# Altium PCB Main Controller.PcbDoc
Units mm, origin at the board's own origin, x right, y up, seen from the top; angles counter-clockwise.
Board outline 100 x 150 mm, 2 copper layers (Top Layer, Bottom Layer); 19 components, 26 nets, 229 pads, 17 vias.
Unrouted connection lines stored in the file: 1.
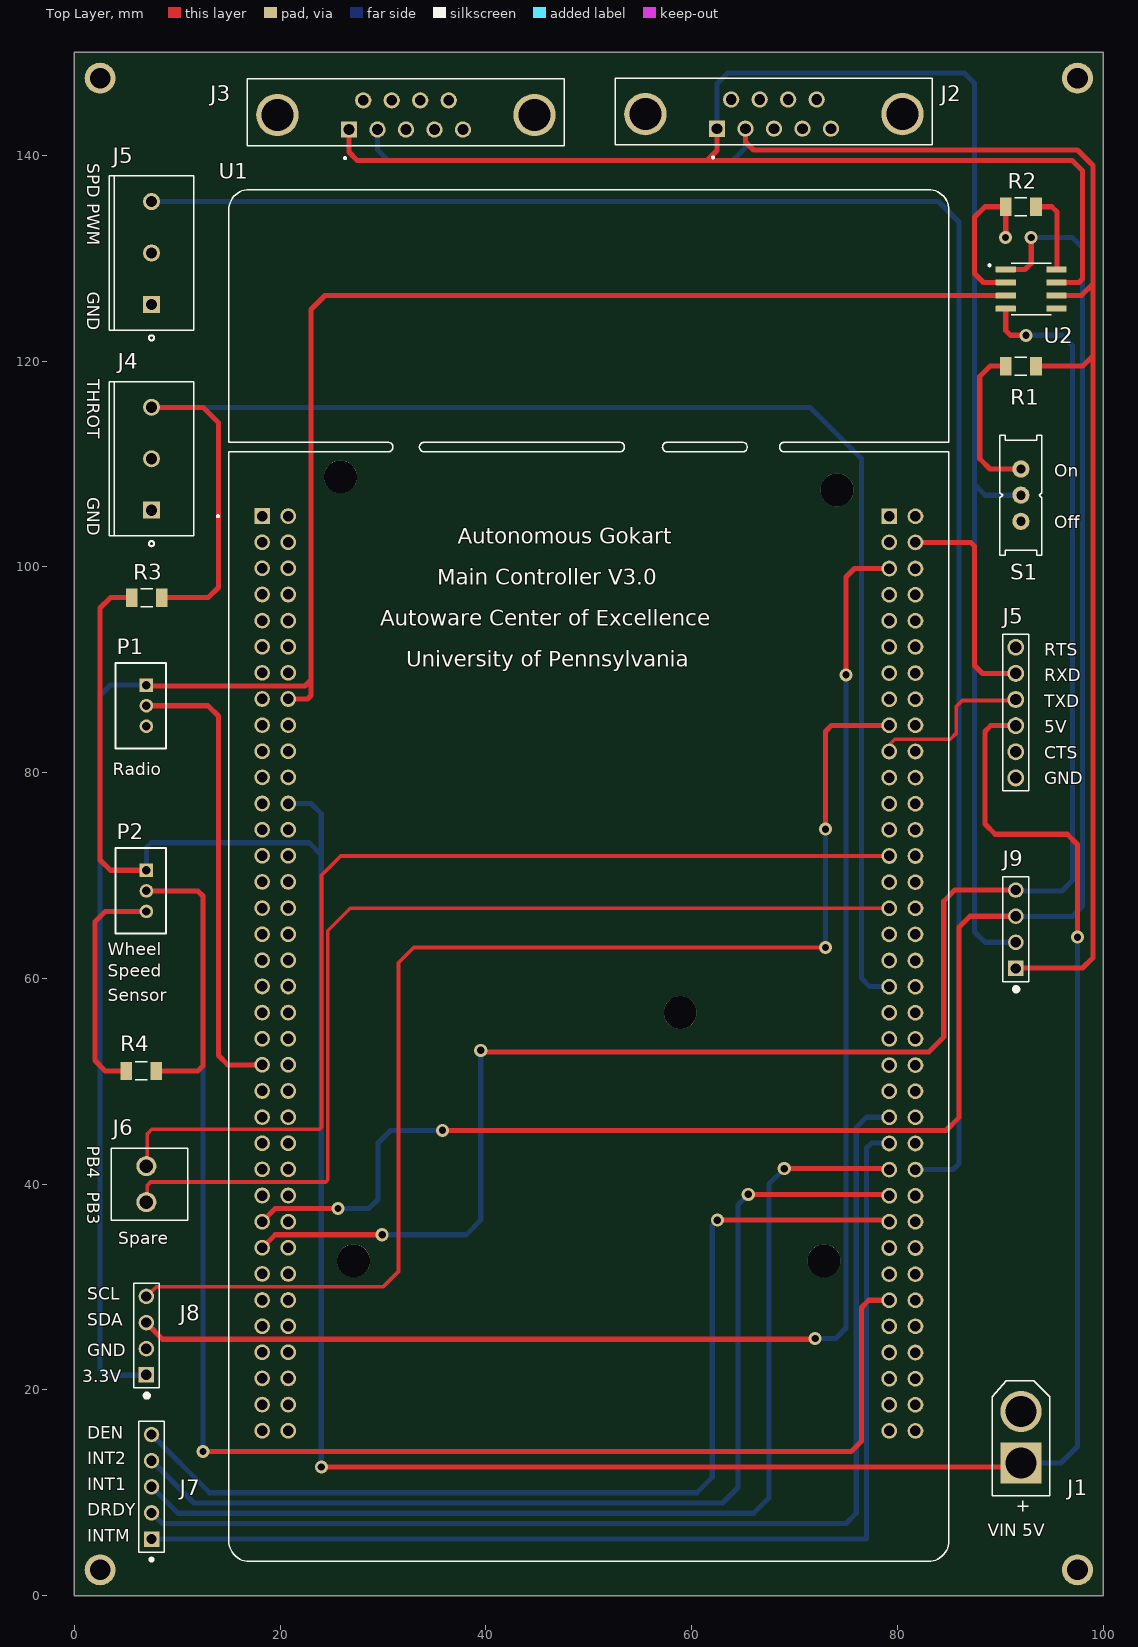
[diagram p0: Top Layer view]
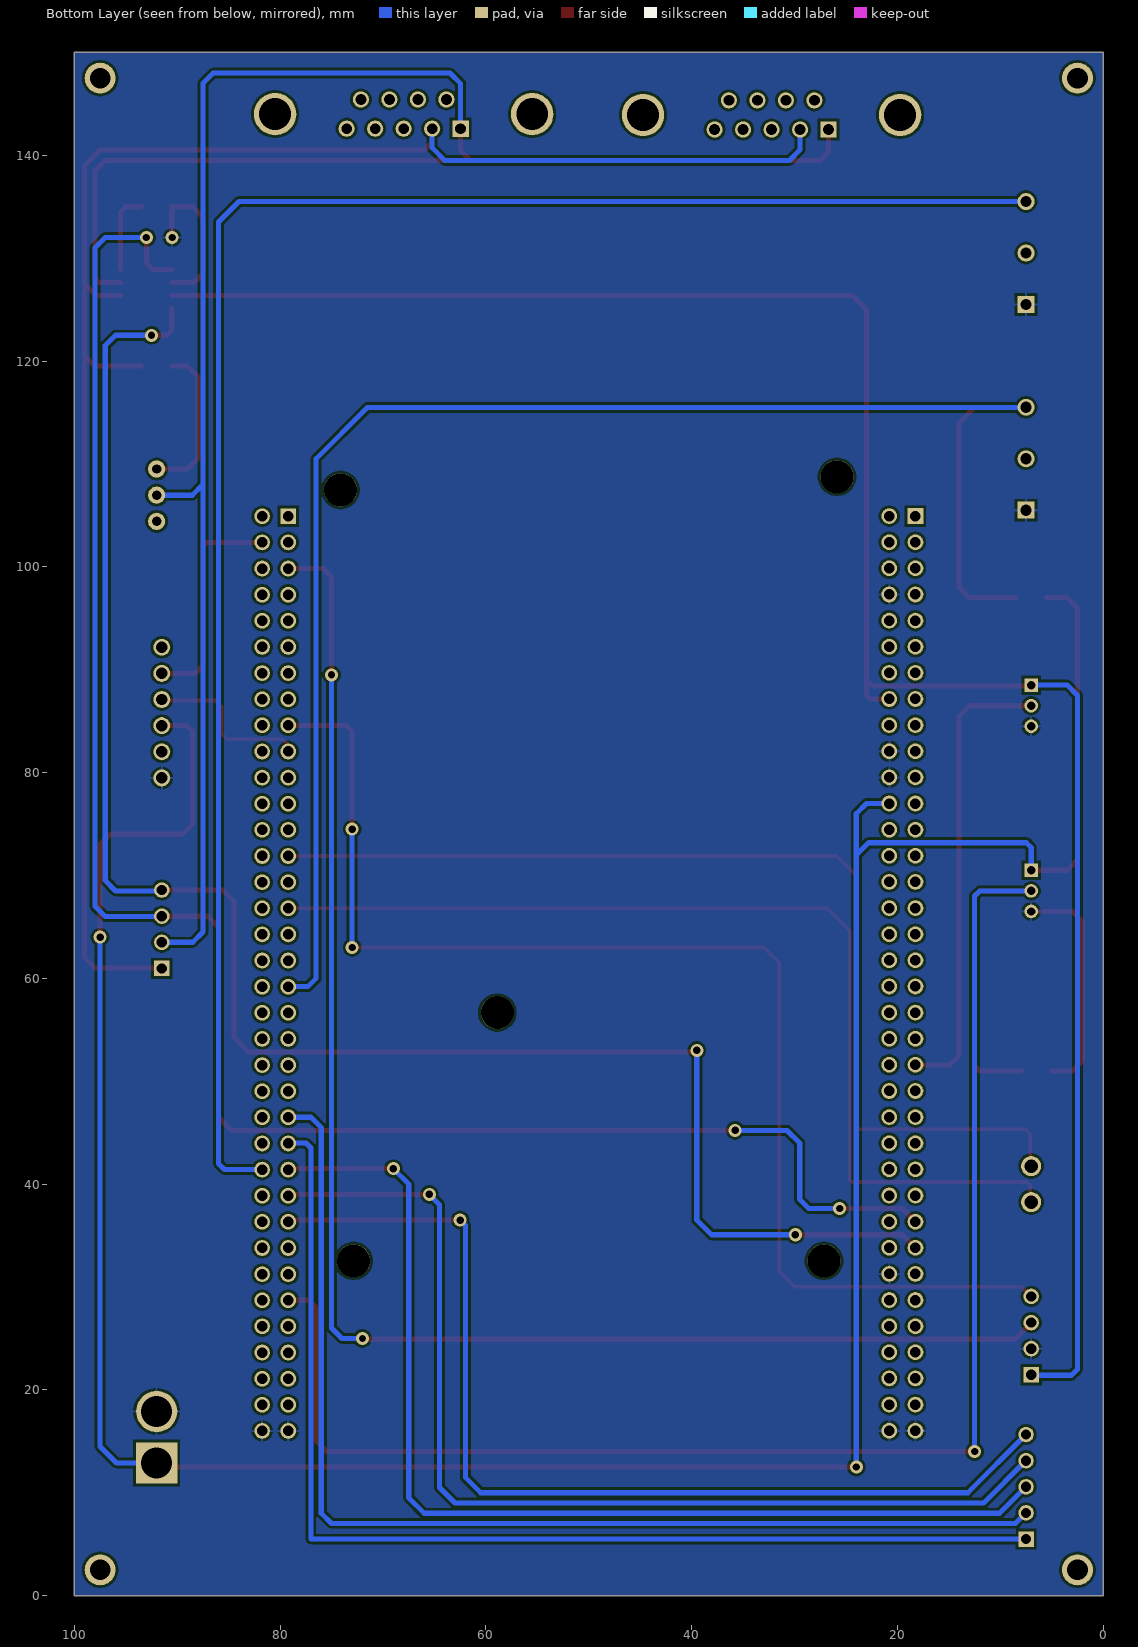
[diagram p1: Bottom Layer view, seen from below]

## Layer stack, top to bottom
Top Solder: solder mask 0.0102, Solder Resist, Dk 3.5
Top Layer: signal copper 0.0356
Dielectric 1: dielectric 0.32, FR-4, Dk 4.8
Bottom Layer: signal copper 0.0356
Bottom Solder: solder mask 0.0102, Solder Resist, Dk 3.5

## Board outline
0,0 0,150 100,150 100,0

## Design rules (kind name [scope] priority, off if disabled: settings)
Clearance [All] p1: gap=0.254 ignorepadtopadclearanceinfootprint=FALSE except(0: Arc-Hole Track-Hole SMDPad-Hole THPad-Hole Via-Hole Fill-Hole Poly-Hole Region-Hole Text-Hole)
HoleSize [All] p1: absolutevalues=TRUE maxlimit=5 minlimit=0.025 maxpercent=80.000 minpercent=20.000
PolygonConnect [All] p1: connectstyle=Relief reliefconductorwidth=0.254 reliefentries=4 polygonreliefangle="90 Angle" airgapwidth=0.254
RoutingVias [All] p1: holewidth=0.711 width=1.27 viastyle="Through Hole" minholewidth=0.711 minwidth=1.27 maxholewidth=0.711 maxwidth=1.27
SolderMaskExpansion [All] p1: expansion=0.102 istentingtop=FALSE
Width [All] p1: maxlimit=2 minlimit=0.254 preferedwidth=0.5 minimp=50.000000 maximp=50.000000 favimp=50.000000
29 further rules are at their usual default settings.

## Classes and differential pairs
component class Sheet1: J1 J2 J3 J4 J5 J6 J7 J8 J9 P1 P2 R1 R2 R3 R4 S1 U1 U2

## Components (designator, comment, footprint, x,y, rotation, side; value= is the part's Value field where it differs from the comment)
J1 "XT30-M" AMASS_XT60-M 92,16.5 r90 top
J2 "D Sub-9" ASSMANN_A-DF_09_A_KG-T2S 67.995,144 r180 top
J3 "D Sub-9" ASSMANN_A-DF_09_A_KG-T2S 32.23,143.92 r180 top
J4 "282836-3" TE_282836-3 7.5,110.5 r90 top
J5 "61300611121" 61300611121 91.5,85.83 r90 top
J5 "282836-3" TE_282836-3 7.5,130.5 r90 top
J6 "Spare" 691214110002 7,40 r270 top
J7 "826629-5" TE_826629-5 7.5,5.5 r90 top
J8 "826629-4" TE_826629-4 7,25.27 r90 top
J9 "826629-4" TE_826629-4 91.5,64.77 r90 top
P1 "Remote Control" B3B-PH-K 7,86.5 r270 top
P2 "Wheel Speed Sensor" B3B-PH-K 7,68.5 r270 top
R1 "120" RESC3216X65N 92,119.5 r0 top
R2 "10K" RESC3216X65N 92,135 r180 top
R3 "2.5K" RESC3216X65N 7.03,97 r0 top
R4 "66K" RESC3216X65N 6.5,51 r0 top
S1 "EG1218" EG1218 92,106.96 r90 top
U1 "NUCLEO-F439ZI" Nucleo-F439ZI 50,70 r0 top
U2 "SN65HVD230QDR" SOIC127P599X175-8N 93,127 r0 top

## Footprints (in the part's own frame and the unit in brackets; to place one, negate y for a bottom-side part, rotate by r counter-clockwise, add the part's x,y. Pads: shape width x height; smd on the part's side, far side on the other; paste and mask are expansions set on the pad)
61300611121 [mm]
  round 1.65 hole 1.1: 1(-6.35,0) 2(-3.81,0) 3(-1.27,0) 4(1.27,0) 5(3.81,0) 6(6.35,0)
  silkscreen extent -7.62,-1.27 7.62,1.27
691214110002 [mm]
  round 1.95 hole 1.3: 1(-1.75,0) 2(1.75,0)
  silkscreen extent -3.5,-3.4 3.5,4
AMASS_XT60-M [mm]
  round 4 hole 3: N(1.4,0)
  rect 4x4 hole 3: P(-3.6,0)
  silkscreen extent -8.3,-2.8 4.4,2.8
ASSMANN_A-DF_09_A_KG-T2S [mm]
  rect 1.575x1.575 / inner round 1.575 / far side rect 1.575x1.575 hole 1.05: 1(5.54,1.42)
  round 1.575 hole 1.05: 2(2.77,1.42) 3(0,1.42) 4(-2.77,1.42) 5(-5.54,1.42) 6(4.155,-1.42) 7(1.385,-1.42) 8(-1.385,-1.42) 9(-4.155,-1.42)
  round 4.116 hole 3.1: S1(-12.495,0) S2(12.495,0)
  silkscreen extent -15.41,-3.5 15.41,4.3
B3B-PH-K [mil]
  rect 52x52 hole 32: 1(-78.74,0)
  round 52 hole 32: 2(0,0) 3(78.74,0)
  silkscreen extent -163,-118 163,75, body extent -156,-89 156,89, height 236
EG1218 [mil]
  round 66 hole 35.43: O(-100,0) P(0,0) S(100,0)
  silkscreen extent -230,-80 230,80
Nucleo-F439ZI [mm]
  rect 1.53x1.53 hole 1.02: CN11_1(-31.75,34.93) CN12_1(29.21,34.91)
  round 1.53 hole 1.02: CN11_2(-31.75,32.39) CN11_3(-31.75,29.85) CN11_4(-31.75,27.31) CN11_5(-31.75,24.77) CN11_6(-31.75,22.23) CN11_7(-31.75,19.69) CN11_8(-31.75,17.15) CN11_9(-31.75,14.61) CN11_10(-31.75,12.07) CN11_11(-31.75,9.53) CN11_12(-31.75,6.99) CN11_13(-31.75,4.45) CN11_14(-31.75,1.91) CN11_15(-31.75,-0.63) CN11_16(-31.75,-3.17) CN11_17(-31.75,-5.71) CN11_18(-31.75,-8.25) CN11_19(-31.75,-10.79) CN11_20(-31.75,-13.33) CN11_21(-31.75,-15.87) CN11_22(-31.75,-18.41) CN11_23(-31.75,-20.95) CN11_24(-31.75,-23.49) CN11_25(-31.75,-26.03) CN11_26(-31.75,-28.57) CN11_27(-31.75,-31.11) CN11_28(-31.75,-33.65) CN11_29(-31.75,-36.19) CN11_30(-31.75,-38.73) CN11_31(-31.75,-41.27) CN11_32(-31.75,-43.81) CN11_33(-31.75,-46.35) CN11_34(-31.75,-48.89) CN11_35(-31.75,-51.43) CN11_36(-31.75,-53.97) CN11_37(-29.21,34.93) CN11_38(-29.21,32.39) CN11_39(-29.21,29.85) CN11_40(-29.21,27.31) CN11_41(-29.21,24.77) CN11_42(-29.21,22.23) CN11_43(-29.21,19.69) CN11_44(-29.21,17.15) CN11_45(-29.21,14.61) CN11_46(-29.21,12.07) CN11_47(-29.21,9.53) CN11_48(-29.21,6.99) CN11_49(-29.21,4.45) CN11_50(-29.21,1.91) CN11_51(-29.21,-0.63) CN11_52(-29.21,-3.17) CN11_53(-29.21,-5.71) CN11_54(-29.21,-8.25) CN11_55(-29.21,-10.79) CN11_56(-29.21,-13.33) CN11_57(-29.21,-15.87) CN11_58(-29.21,-18.41) CN11_59(-29.21,-20.95) CN11_60(-29.21,-23.49) CN11_61(-29.21,-26.03) CN11_62(-29.21,-28.57) CN11_63(-29.21,-31.11) CN11_64(-29.21,-33.65) CN11_65(-29.21,-36.19) CN11_66(-29.21,-38.73) CN11_67(-29.21,-41.27) CN11_68(-29.21,-43.81) CN11_69(-29.21,-46.35) CN11_70(-29.21,-48.89) CN11_71(-29.21,-51.43) CN11_72(-29.21,-53.97) CN12_2(29.21,32.37) CN12_3(29.21,29.83) CN12_4(29.21,27.29) CN12_5(29.21,24.75) CN12_6(29.21,22.21) CN12_7(29.21,19.67) CN12_8(29.21,17.13) CN12_9(29.21,14.59) CN12_10(29.21,12.05) CN12_11(29.21,9.51) CN12_12(29.21,6.97) CN12_13(29.21,4.43) CN12_14(29.21,1.89) CN12_15(29.21,-0.65) CN12_16(29.21,-3.19) CN12_17(29.21,-5.73) CN12_18(29.21,-8.27) CN12_19(29.21,-10.81) CN12_20(29.21,-13.35) CN12_21(29.21,-15.89) CN12_22(29.21,-18.43) CN12_23(29.21,-20.97) CN12_24(29.21,-23.51) CN12_25(29.21,-26.05) CN12_26(29.21,-28.59) CN12_27(29.21,-31.13) CN12_28(29.21,-33.67) CN12_29(29.21,-36.21) CN12_30(29.21,-38.75) CN12_31(29.21,-41.29) CN12_32(29.21,-43.83) CN12_33(29.21,-46.37) CN12_34(29.21,-48.91) CN12_35(29.21,-51.45) CN12_36(29.21,-53.99) CN12_37(31.75,34.91) CN12_38(31.75,32.37) CN12_39(31.75,29.83) CN12_40(31.75,27.29) CN12_41(31.75,24.75) CN12_42(31.75,22.21) CN12_43(31.75,19.67) CN12_44(31.75,17.13) CN12_45(31.75,14.59) CN12_46(31.75,12.05) CN12_47(31.75,9.51) CN12_48(31.75,6.97) CN12_49(31.75,4.43) CN12_50(31.75,1.89) CN12_51(31.75,-0.65) CN12_52(31.75,-3.19) CN12_53(31.75,-5.73) CN12_54(31.75,-8.27) CN12_55(31.75,-10.81) CN12_56(31.75,-13.35) CN12_57(31.75,-15.89) CN12_58(31.75,-18.43) CN12_59(31.75,-20.97) CN12_60(31.75,-23.51) CN12_61(31.75,-26.05) CN12_62(31.75,-28.59) CN12_63(31.75,-31.13) CN12_64(31.75,-33.67) CN12_65(31.75,-36.21) CN12_66(31.75,-38.75) CN12_67(31.75,-41.29) CN12_68(31.75,-43.83) CN12_69(31.75,-46.37) CN12_70(31.75,-48.91) CN12_71(31.75,-51.45) CN12_72(31.75,-53.99)
  round 3.2 hole 3.2 unplated: ""(-24.13,38.74) ""(-22.86,-37.46) ""(8.89,-13.33) ""(22.86,-37.46) ""(24.13,37.47)
  silkscreen extent -36.14,-66.67 35,66.67
RESC3216X65N [mm]
  rect 1.13x1.77 smd: 1(-1.47,0) 2(1.47,0)
  silkscreen extent -0.58,-0.88 0.58,0.88
SOIC127P599X175-8N [mm]
  rrect25% 1.97x0.6 smd: 1(-2.47,1.905) 2(-2.47,0.635) 3(-2.47,-0.635) 4(-2.47,-1.905) 5(2.47,-1.905) 6(2.47,-0.635) 7(2.47,0.635) 8(2.47,1.905)
  silkscreen extent -4.14,-2.52 1.95,2.52, body extent -3,-2.45 3,2.45, height 1.75
TE_282836-3 [mm]
  rect 1.65x1.65 hole 1.1: 1(-5,0)
  round 1.65 hole 1.1: 2(0,0) 3(5,0)
  silkscreen extent -8.5,-4.1 7.5,4.1
TE_826629-4 [mm]
  rect 1.508x1.508 hole 1: 1(-3.81,0)
  round 1.508 hole 1: 2(-1.27,0) 3(1.27,0) 4(3.81,0)
  silkscreen extent -6.03,-1.25 5.08,1.25
TE_826629-5 [mm]
  rect 1.508x1.508 hole 1: 1(0,0)
  round 1.508 hole 1: 2(2.54,0) 3(5.08,0) 4(7.62,0) 5(10.16,0)
  silkscreen extent -2.15,-1.25 11.43,1.25

## Part data
J1: "Plug; DC supply; XT60; male; PIN: 2; for cable; soldered; 30A; 500V", Package=Package, Availability="Not in stock", Check_prices=https://www.snapeda.com/parts/XT60-M/AMASS/view-part/?ref=eda, MF=AMASS, MP=XT60-M, Price=None, SnapEDA_Link=https://www.snapeda.com/parts/XT60-M/AMASS/view-part/?ref=snap
J2 J3: library part A-DF_09_A_KG-T2S, "9 Position D-Sub Receptacle, Female Sockets Connector", Package=None, Availability="In Stock", Check_prices=https://www.snapeda.com/parts/A-DF%2009%20A/KG-T2S/Assmann+WSW+Components/view-part/?ref=eda, MF="Assmann WSW", MP="A-DF 09 A/KG-T2S", Price=None, Purchase-URL="https://pricing.snapeda.com/search/part/A-DF 09 A/KG-T2S/?ref=eda", SnapEDA_Link=https://www.snapeda.com/parts/A-DF%2009%20A/KG-T2S/Assmann+WSW+Components/view-part/?ref=snap
J4 J5: "TERM BLOCK 3POS SIDE ENTRY 5MM", Package=None, Availability=Unavailable, MP=282836-3, Price=None
J5: "Connector Header Through Hole 6 position 0.100 (2.54mm)", Package=None, Availability="In Stock", Check_prices=https://www.snapeda.com/parts/61300611121/Wurth+Elektronik/view-part/?ref=eda, MF="WÃ¼rth Elektronik", MP=61300611121, Price=None, Purchase-URL=https://pricing.snapeda.com/search/part/61300611121/?ref=eda, SnapEDA_Link=https://www.snapeda.com/parts/61300611121/Wurth+Elektronik/view-part/?ref=snap
J6: library part 691214110002, "2 Position Wire to Board Terminal Block Horizontal with Board 0.138 (3.50mm) Through Hole", Package=None, Availability="In Stock", Check_prices=https://www.snapeda.com/parts/691214110002/Wurth+Elektronik/view-part/?ref=eda, MF="WÃ¼rth Elektronik", MP=691214110002, Price=None, Purchase-URL=https://pricing.snapeda.com/search/part/691214110002/?ref=eda, SnapEDA_Link=https://www.snapeda.com/parts/691214110002/Wurth+Elektronik/view-part/?ref=snap
J7: "Board-To-Board Connector, AMPMODU MOD II Series, Through Hole, Header, 5, 2.54 mm", Package=None, Availability=Unavailable, Centerline_Pitch="2.54 mm[.1 in]", EU_RoHS_Compliance=Compliant, MF="TE Connectivity", MP=826629-5, Number_of_Positions=5, Price=None, Product_Type=Connector, SnapEDA_Link=https://www.snapeda.com/parts/826629-5/TE%20Connectivity%20AMP%20Connectors/view-part/905319/?ref=snap, TE_purchase_URL=https://www.te.com/usa-en/product-826629-5.html?te_bu=Cor&te_type=disp&te_campaign=seda_glo_cor-seda-global-disp-prtnr-fy19-seda-model-bom-cta_sma-317_1&elqCampaignId=32493
J8 J9: "Conn Unshrouded Header HDR 4 POS 2.54mm Solder ST Thru-Hole Automotive Carton", Package=None, Availability=Unavailable, EU_RoHS_Compliance=Compliant, MF="TE Connectivity", MP=826629-4, Price=None, SnapEDA_Link=https://www.snapeda.com/parts/826629-4/TE%20Connectivity%20AMP%20Connectors/view-part/891255/?ref=snap, TE_purchase_URL=https://www.te.com/usa-en/product-826629-4.html?te_bu=Cor&te_type=disp&te_campaign=seda_glo_cor-seda-global-disp-prtnr-fy19-seda-model-bom-cta_sma-317_1&elqCampaignId=32493
P1 P2: library part B3B-PH-K, "Connector Header Through Hole 3 position 0.079 (2.00mm)", Package=None, Availability="No availability data", Check_prices=https://www.snapeda.com/parts/B3B-PH-K/JST/view-part/2895696/?ref=eda, MF=JST, MP=B3B-PH-K, Price=None, SnapEDA_Link=https://www.snapeda.com/parts/B3B-PH-K/JST/view-part/2895696/?ref=snap
R1 R2 R3 R4: library part KTR18EZPF9530, Package=None, Availability=Unavailable, MP=KTR18EZPF9530, Price=None
S1: "<b>SLIDING SWITCH</b><p> 0.1\" spacing through hole, vertical SPDT slide switch <p>http://www.ladyada.net/library/pcb/eaglelibrary.html</p>", Package=None, Availability=Unavailable, MP=EG1218, Price=None
U1: "STM32F429ZI, mbed-Enabled Development Nucleo-144 STM32F4 ARMÂ® CortexÂ®-M4 MCU 32-Bit Embedded Evaluation Board", Package=None, Availability=Unavailable, MP=NUCLEO-F429ZI, Price=None
U2: "3.3-V CAN Transceiver with Standby Mode 8-SOIC -40 to 125", Package="SOIC-8 Texas Instruments", Availability=Good, Check_prices=https://www.snapeda.com/parts/SN65HVD230QDR/Texas%20Instruments/view-part/1178075/?ref=eda, MF="Texas Instruments", MP=SN65HVD230QDR, Price=None, Purchase-URL=https://pricing.snapeda.com/search/part/SN65HVD230QDR/?ref=eda, SnapEDA_Link=https://www.snapeda.com/parts/SN65HVD230QDR/Texas%20Instruments/view-part/1178075/?ref=snap

## Free pads (board coordinates)
  round 3 hole 2: 6(2.5,2.5) 6(2.5,147.5) 6(97.5,2.5) 6(97.5,147.5)

## Via types
v1: diameter 1.27, hole 0.711, Top Layer to Bottom Layer, 17 vias

## Nets (pads, with @x,y where several pads share a name; then routed paths per layer and width w, separated by ;. In a path a pad name is that pad's centre, name@x,y a point inside that pad or via, vN(x,y) a via of type N, cw(c..) or ccw(c..) an arc to the next point about the centre after c; other vN are vias at no path point)
3.3V: J8.1 P1.1 U1.CN11_44 U2.3 | length 199.3
  Top Layer w0.5: P1.1@7,88.421 22.421,88.421 23,89 ; U1.CN11_44 22.65,87.15 23,87.5 23,89 ; U2.3 24.365,126.365 23,125 23,89
  Bottom Layer w0.5: J8.1@7,21.42 3.08,21.42 2.5,22 2.5,87.5 3.5,88.5 P1.1
5V: J1.P J5.3@91.5,84.56 P2.1 R3.1 U1.CN11_48 | length 274.6
  Top Layer w0.5: R3.1@5.5,97 3.5,97 2.5,96 2.5,71.5 3.5,70.5 P2.1 ; v1(24,12.5) J1.P@92,12.5 ; J5.3@91.5,84.56 89.06,84.56 88.5,84 88.5,75 89.5,74 96.5,74 97.5,73 v1(97.5,64)
  Bottom Layer w0.5: P2.1 7,72.707 7.472,73.179 22.821,73.179 24,72 ; U1.CN11_48 23.01,76.99 24,76 24,72 ; v1(24,12.5) 24,72 ; J1.P 95.9,12.9 97.5,14.5 v1(97.5,64)
CAN_HIGH: J2.1 J3.1 J9.2 S1.P U2.7 | length 213
  Top Layer w0.5: J3.1 26.69,140.31 27.5,139.5 61.5,139.5 ; J2.1 62.455,140.455 61.5,139.5 ; U2.7 97.635,127.635 98,128 98,138.5 97,139.5 61.5,139.5
  Bottom Layer w0.5: J2.1 62.455,146.955 63.5,148 86.5,148 87.5,147 87.5,108 ; J9.2 88.5,63.5 87.5,64.5 87.5,108 ; S1.P 88.54,106.96 87.5,108
CAN_LOW: J2.2 J3.2 J9.1 R1.2 U2.6 | length 171.4
  Top Layer w0.5: J2.2 65.225,141.275 66,140.5 97.5,140.5 99,139 99,127.5 ; J9.1 91.54,61 98,61 99,62 99,120.5 ; R1.2 98,119.5 99,120.5 ; U2.6 97.865,126.365 99,127.5 ; 99,120.5 99,127.5
  Bottom Layer w0.5: J3.2 29.46,140.54 30.5,139.5 64,139.5 65.225,140.725 J2.2
CAN_RX: J9.4 U1.CN11_29 U2.4 | length 172.3
  Top Layer w0.5: U1.CN11_29 19.519,35.079 v1(29.921,35.079) ; v1@39.5,52.841 83.048,52.841 84.5,54.293 84.5,67.5 85.58,68.58 J9.4 ; U2.4 90.53,122.97 91,122.5 v1(92.5,122.5)
  Bottom Layer w0.5: v1(29.921,35.079) 38.079,35.079 39.5,36.5 v1(39.5,53) ; J9.4 91.58,68.5 96,68.5 97,69.5 97,121.5 96,122.5 v1(92.5,122.5)
CAN_TX: J9.3 U1.CN11_28 U2.1 | length 181.2
  Top Layer w0.5: U1.CN11_28 19.519,37.619 v1(25.619,37.619) ; v1(35.779,45.221) 84.721,45.221 86,46.5 86,65 87.04,66.04 J9.3 ; U2.1 92.405,128.905 93,129.5 v1(93,132)
  Bottom Layer w0.5: v1(25.619,37.619) 28.619,37.619 29.5,38.5 29.5,44 30.721,45.221 v1(35.779,45.221) ; J9.3 91.54,66 97,66 98,67 98,131 97,132 v1(93,132)
CTS: J5.2@91.5,82.02
DEN: J7.5 U1.CN12_28 | length 99.5
  Top Layer w0.5: v1(62.5,36.5) 79.04,36.5 U1.CN12_28
  Bottom Layer w0.5: J7.5 13.16,10 60.5,10 62,11.5 62,36 v1(62.5,36.5)
DRDY: J7.2 U1.CN12_24 | length 111.1
  Bottom Layer w0.5: J7.2@7,7.92 J7.2@7.58,7.92 ; J7.2 8.54,7 75,7 76,8 76,45.5 77,46.5 79.2,46.5 U1.CN12_24
GND: J1.N J4.1 J5.1 J8.2 P1.3 P2.3 R2.2 R4.1 U1.CN11_36 U1.CN11_40 U1.CN11_46 U1.CN11_47 U1.CN11_66 U1.CN11_72 U1.CN12_36 U1.CN12_72 U2.2 | length 37.7
  Top Layer w0.5: R4.1 3,51 2,52 2,65.5 3,66.5 P2.3 ; U2.2 88.365,127.635 87.5,128.5 87.5,134 88.5,135 R2.2 v1@90.53,132.03
  other v1: 90.5,132
INT1: J7.3 U1.CN12_26 | length 104.6
  Top Layer w0.5: v1(69,41.5) 79.12,41.5 U1.CN12_26
  Bottom Layer w0.5: J7.3 10.08,8 66,8 67.5,9.5 67.5,40 v1(69,41.5)
INT2: J7.4 U1.CN12_27 | length 102
  Top Layer w0.5: v1(65.5,39) 79.08,39 U1.CN12_27
  Bottom Layer w0.5: J7.4 11.62,9 63,9 64.5,10.5 64.5,38 v1(65.5,39)
INTM: J7.1 U1.CN12_25 | length 109.9
  Bottom Layer w0.5: J7.1 77,5.5 77,43.5 77.5,44 79.16,44 U1.CN12_25
NetR1_1: R1.1 S1.S | length 15.4
  Top Layer w0.5: R1.1 89,119.5 88,118.5 88,110.5 89,109.5 S1.S
NetR2_1: R2.1 U2.8 | length 7.8
  Top Layer w0.5: R2.1 95,135 95.5,134.5 95.5,128.935 U2.8
PB3: J6.2 U1.CN12_16 | length 99.1
  Top Layer w0.35: J6.2 7.1,38.35 7.1,39.9 7.4,40.2 24.423,40.2 24.628,40.405 24.628,64.628 26.81,66.81 U1.CN12_16
PB4: J6.1 U1.CN12_14 | length 100.8
  Top Layer w0.35: J6.1 7.1,41.85 7.1,44.9 7.516,45.316 23.819,45.316 24.024,45.521 24.024,70.024 25.89,71.89 U1.CN12_14
Radio: P1.2 U1.CN11_22 | length 45
  Top Layer w0.5: P1.2 13,86.5 14,85.5 14,52.5 14.91,51.59 U1.CN11_22
RTS: J5.6
RXD: J5.5 U1.CN12_38 | length 21.8
  Top Layer w0.5: U1.CN12_38 87.13,102.37 87.5,102 87.5,90.4 88.26,89.64 J5.5
SCL: J8.4 U1.CN12_9 | length 125.1
  Top Layer w0.35: J8.4@7,29.04 7.998,30.038 30.038,30.038 31.5,31.5 31.5,61.5 33,63 v1(73,63)
  Top Layer w0.5: v1(73,74.5) 73,84 73.59,84.59 U1.CN12_9
  Bottom Layer w0.5: v1(73,63) v1(73,74.5)
SDA: J8.3 U1.CN12_3 | length 146.7
  Top Layer w0.5: J8.3@7,26.5 8.579,24.921 17.724,24.921 18.776,24.921 20.264,24.921 21.316,24.921 71.921,24.921 v1(72,25) ; v1(75,89.5) 75,99 75.83,99.83 U1.CN12_3
  Bottom Layer w0.5: v1(72,25) 74,25 75,26 v1(75,89.5)
"Speed PWM": J5.3@7.5,135.5 U1.CN12_62 | length 175.3
  Bottom Layer w0.5: J5.3@7.5,135.5 84,135.5 85.987,133.513 85.987,41.987 85.41,41.41 U1.CN12_62
Switch: P2.2 R4.2 U1.CN12_31 | length 167.1
  Top Layer w0.5: P2.2 12,68.5 12.5,68 12.5,51.5 12,51 R4.2 ; v1(12.5,14) 75.5,14 76.5,15 76.5,28 77.21,28.71 U1.CN12_31
  Bottom Layer w0.5: P2.2 12,68.5 12.5,68 v1(12.5,14)
Throttle: J4.3 R3.2 U1.CN12_19 | length 153.3
  Top Layer w0.5: J4.3 12.5,115.5 14,114 14,98 13,97 R3.2
  Bottom Layer w0.5: J4.3@8,115.356 8,115.469 8.031,115.5 71.5,115.5 76.5,110.5 76.5,60 77.31,59.19 U1.CN12_19
TXD: J5.4 U1.CN12_10 | length 16.1
  Top Layer w0.35: U1.CN12_10 79.21,82.71 79.744,83.244 82.245,83.244 85.144,83.244 85.7,83.8 85.7,86.4 86.3,87 J5.4@91.336,87
pads on no net: J2.3 J2.4 J2.5 J2.6 J2.7 J2.8 J2.9 J2.S1 J2.S2 J3.3 J3.4 J3.5 J3.6 J3.7 J3.8 J3.9 J3.S1 J3.S2 J4.2 J5.2@7.5,130.5 S1.O U1. U1.CN11_1 U1.CN11_2 U1.CN11_3 U1.CN11_4 U1.CN11_5 U1.CN11_6 U1.CN11_7 U1.CN11_8 U1.CN11_9 U1.CN11_10 U1.CN11_11 U1.CN11_12 U1.CN11_13 U1.CN11_14 U1.CN11_15 U1.CN11_16 U1.CN11_17 U1.CN11_18 U1.CN11_19 U1.CN11_20 U1.CN11_21 U1.CN11_23 U1.CN11_24 U1.CN11_25 U1.CN11_26 U1.CN11_27 U1.CN11_30 U1.CN11_31 U1.CN11_32 U1.CN11_33 U1.CN11_34 U1.CN11_35 U1.CN11_37 U1.CN11_38 U1.CN11_39 U1.CN11_41 U1.CN11_42 U1.CN11_43 U1.CN11_45 U1.CN11_49 U1.CN11_50 U1.CN11_51 U1.CN11_52 U1.CN11_53 U1.CN11_54 U1.CN11_55 U1.CN11_56 U1.CN11_57 U1.CN11_58 U1.CN11_59 U1.CN11_60 U1.CN11_61 U1.CN11_62 U1.CN11_63 U1.CN11_64 U1.CN11_65 U1.CN11_67 U1.CN11_68 U1.CN11_69 U1.CN11_70 U1.CN11_71 U1.CN12_1 U1.CN12_2 U1.CN12_4 U1.CN12_5 U1.CN12_6 U1.CN12_7 U1.CN12_8 U1.CN12_11 U1.CN12_12 U1.CN12_13 U1.CN12_15 U1.CN12_17 U1.CN12_18 U1.CN12_20 U1.CN12_21 U1.CN12_22 U1.CN12_23 U1.CN12_29 U1.CN12_30 U1.CN12_32 U1.CN12_33 U1.CN12_34 U1.CN12_35 U1.CN12_37 U1.CN12_39 U1.CN12_40 U1.CN12_41 U1.CN12_42 U1.CN12_43 U1.CN12_44 U1.CN12_45 U1.CN12_46 U1.CN12_47 U1.CN12_48 U1.CN12_49 U1.CN12_50 U1.CN12_51 U1.CN12_52 U1.CN12_53 U1.CN12_54 U1.CN12_55 U1.CN12_56 U1.CN12_57 U1.CN12_58 U1.CN12_59 U1.CN12_60 U1.CN12_61 U1.CN12_63 U1.CN12_64 U1.CN12_65 U1.CN12_66 U1.CN12_67 U1.CN12_68 U1.CN12_69 U1.CN12_70 U1.CN12_71 U2.5

## Polygon pours and split planes (outlines as drawn)
GND on Bottom Layer "NONET_L02_P-001" (solid, pour order 0): 0,150 100,150 100,0 0,0

## Silkscreen, mask and mechanical layers (free items; w line width, h text height)
Top Overlay:
  text "SPD PWM" at 1.254,139.246 h1.2 r270
  text "GND" at 1.254,126.746 h1.2 r270
  text "THROT" at 1.254,118.246 h1.2 r270
  text "On" at 95.254,108.754 h1.2
  text "GND" at 1.254,106.746 h1.2 r270
  text "Off" at 95.254,103.754 h1.2
  text "Autonomous Gokart" at 37.254,102.254 h1.52
  text "Main Controller V3.0" at 35.254,98.254 h1.52
  text "Autoware Center of Excellence" at 29.754,94.254 h1.52
  text "RTS" at 94.254,91.354 h1.2
  text "University of Pennsylvania" at 32.254,90.262 h1.52
  text "RXD" at 94.254,88.854 h1.2
  text "TXD" at 94.254,86.354 h1.2
  text "5V" at 94.254,83.854 h1.2
  text "CTS" at 94.254,81.354 h1.2
  text "Radio" at 3.754,79.754 h1.2
  text "GND" at 94.254,78.854 h1.2
  text "Wheel" at 3.254,62.254 h1.2
  text "Speed" at 3.254,60.154 h1.2
  text "Sensor" at 3.254,57.754 h1.2
  text "PB4" at 1.254,43.746 h1.2 r270
  text "PB3" at 1.254,39.246 h1.2 r270
  text "Spare" at 4.254,34.154 h1.2
  text "SCL" at 1.254,28.754 h1.2
  text "SDA" at 1.254,26.254 h1.2
  text "GND" at 1.254,23.254 h1.2
  text "3.3V" at 0.754,20.754 h1.2
  text "DEN" at 1.254,15.254 h1.2
  text "INT2" at 1.254,12.754 h1.2
  text "INT1" at 1.254,10.254 h1.2
  text "DRDY" at 1.254,7.754 h1.2
  text "VIN 5V" at 88.754,5.754 h1.2
  text "INTM" at 1.254,5.254 h1.2
Mechanical 1:
  the board outline again, w0.254

## Text inside footprints (layer, text, board x,y; h text height)
J6: Mechanical 13 "1" at 4.245,42.254 h1.27 r270